# EAGLE board PS-001 (EAGLE 9.5.2)
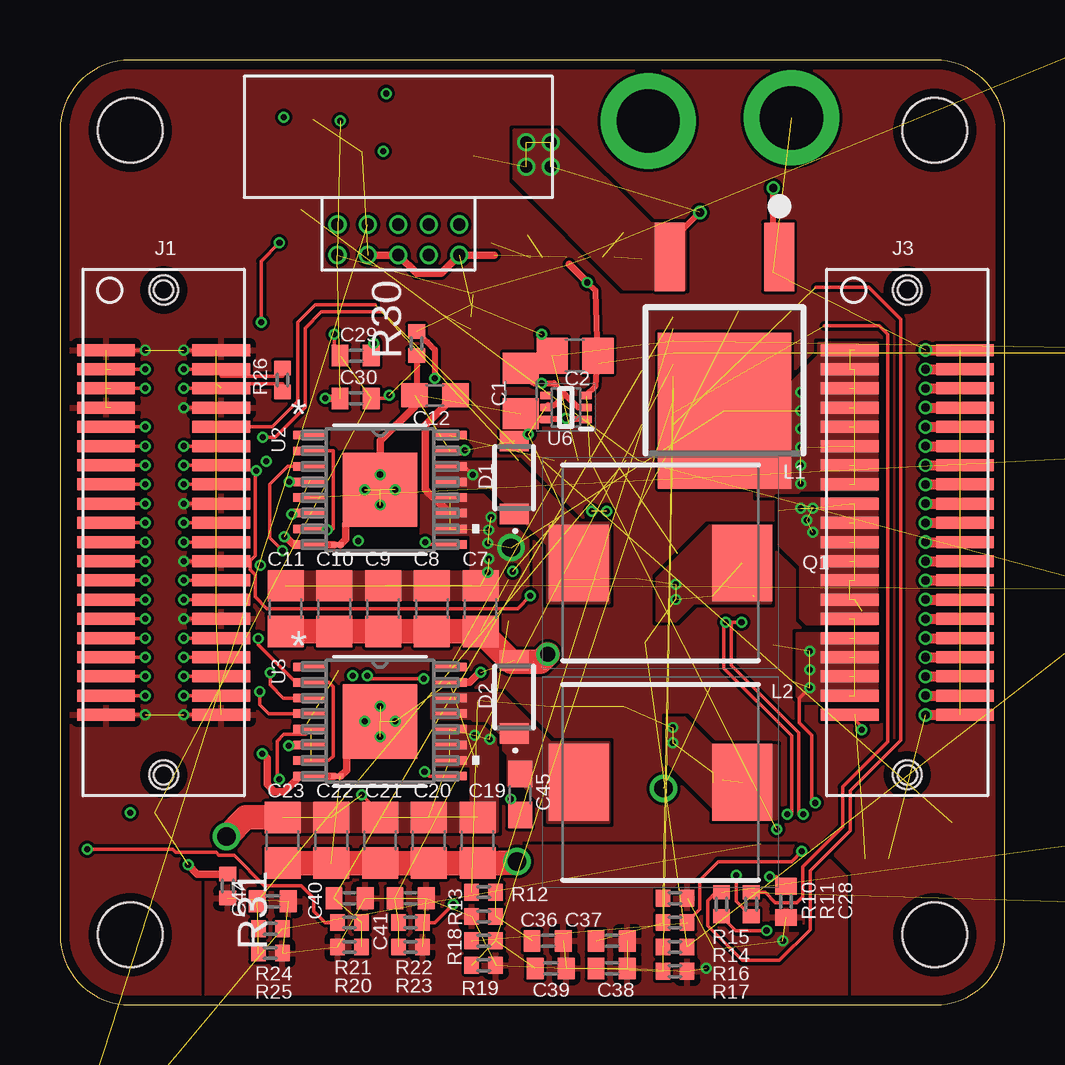
[diagram p0: board, top side]
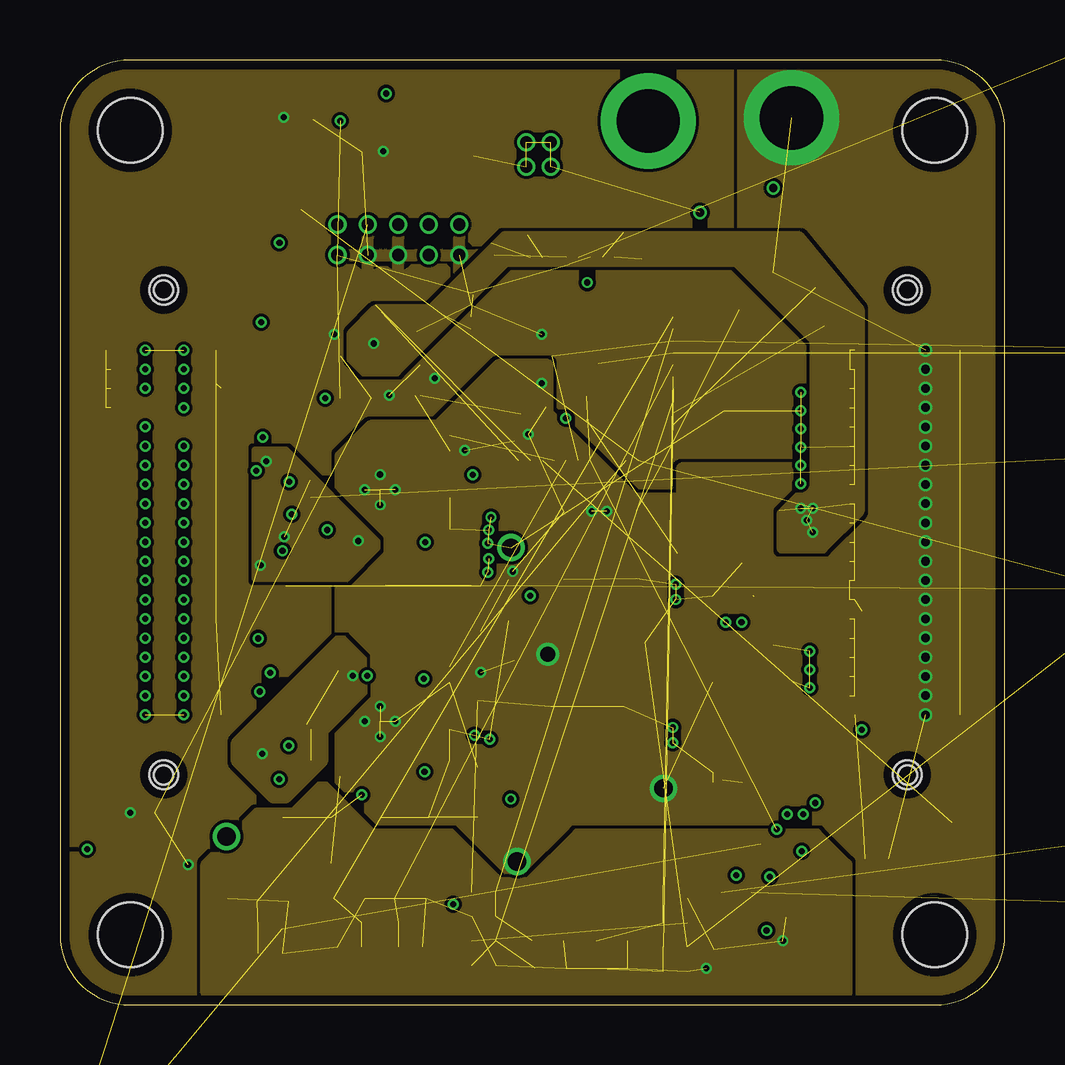
[diagram p1: board, inner layer Route2]
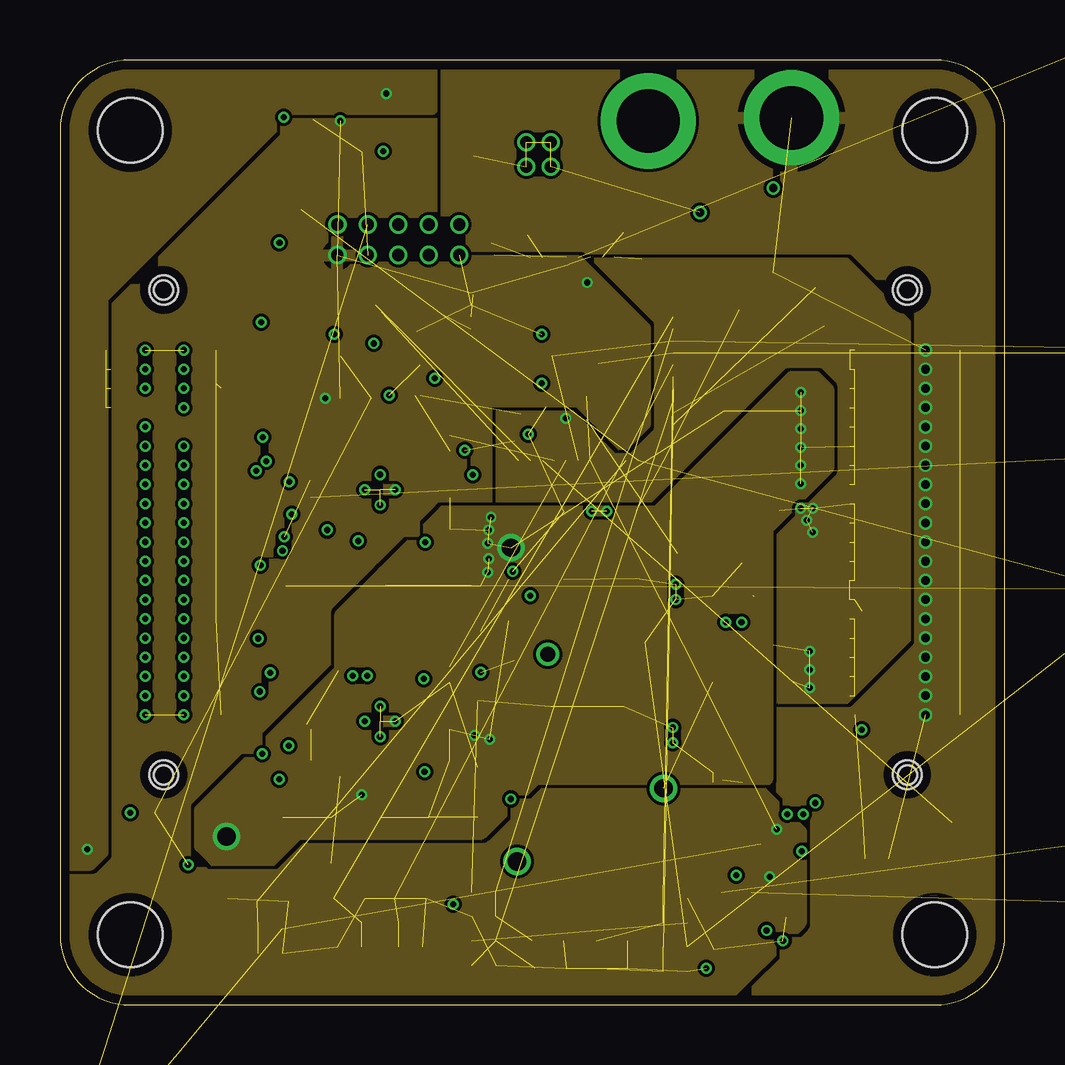
[diagram p2: board, inner layer Route15]
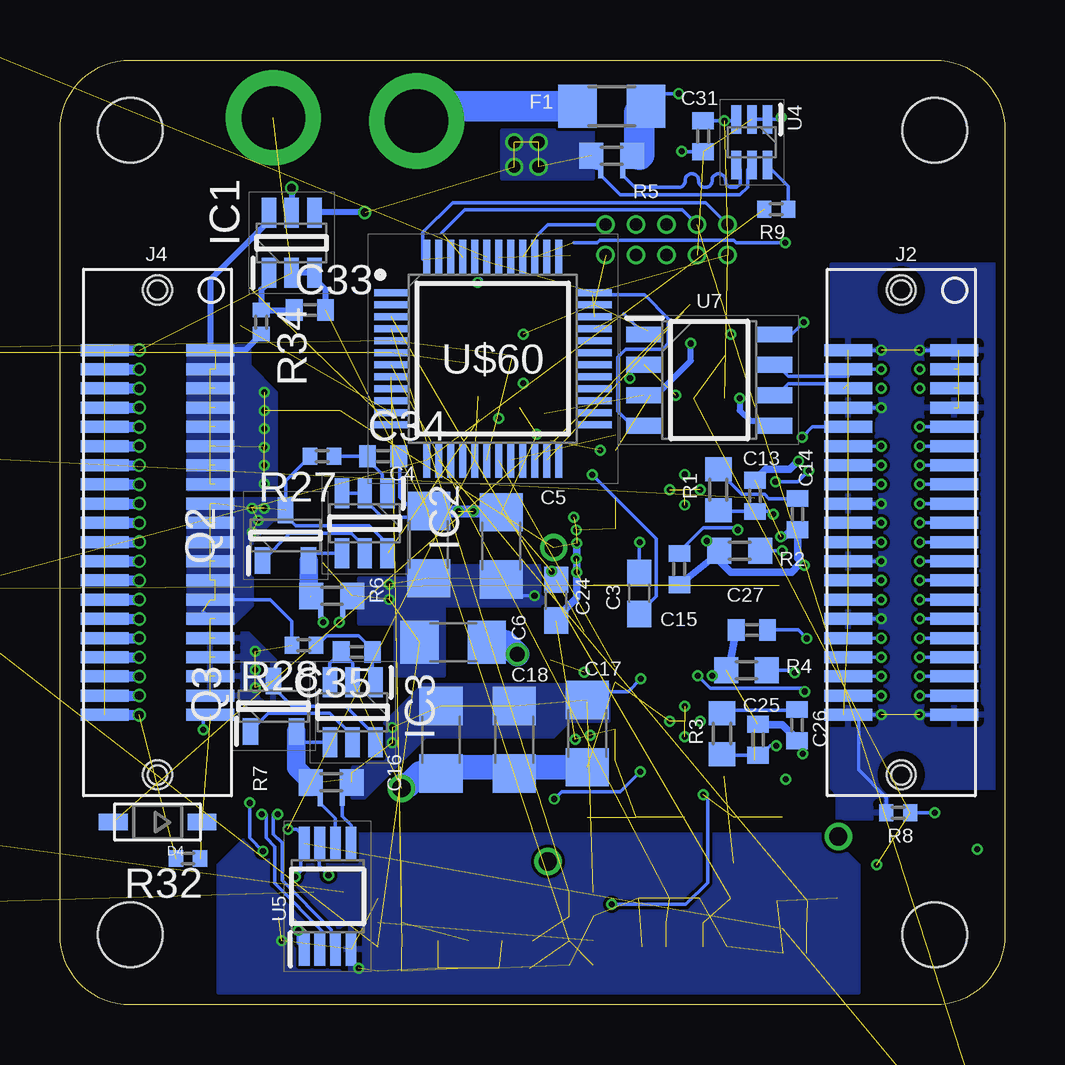
[diagram p3: board, bottom side, seen from below]

Size 39.37 x 39.37 mm. Coordinates in mm from the lower left corner, seen from the top.
Outline: 0,36.45 0,2.92 arc90 2.92,0 36.45,0 arc90 39.37,2.92 39.37,36.45 arc90 36.45,39.37 2.92,39.37 arc90 0,36.45
Copper layers (1*2*15*16): Top 0.035559375mm / dielectric 0.17018125mm / Route2 0.01778125mm / dielectric 47mil / Route15 0.01778125mm / dielectric 0.17018125mm / Bottom 0.035559375mm
Design rules "OSHPark-4layer *": minimum track width 6mil, minimum drill 10mil, track to track 5mil, track to pad 5mil, pad to pad 5mil, via to via 5mil, smd to smd 5mil, copper to edge 15mil, drill to drill 6mil, minimum pad ring 4mil, minimum via ring 4mil, stop-mask expansion 2.5mil, vias tented up to drill 14mil, thermal gap 10mil
Holes 2.69 mm at 2.92,36.45 36.45,36.45 36.45,2.92 2.92,2.92
vRestrict: area 0,0 to 5.8,5.8; area 33.5,0 to 39.4,5.8; area 33.5,33.5 to 39.4,39.4; area 0,33.5 to 5.8,39.4

## Footprints (pad centres in the part's own frame; a part is rotated, then mirrored left to right if it is on the bottom)
C0805 = smd 1.3 x 1.5: 1 -0.95,0; 2 0.95,0
C0603 = smd 1.1 x 1: 1 -0.85,0; 2 0.85,0
C1206 = smd 1.6 x 1.8: 1 -1.4,0; 2 1.4,0
C0402 = smd 0.7 x 0.9: 1 -0.65,0; 2 0.65,0
PMDU = smd 1.2 x 0.85: 1 0,1.525; 2 0,-1.525
SOD-123 = smd 1.2 x 0.7: A 1.85,0; C -1.85,0
R1206 = smd 1.6 x 1.803: 1 -1.422,0; 2 1.422,0
SOT95P280X110-6N = smd 1.25 x 0.6: 1 -1.25,0.95; 2 -1.25,0; 3 -1.25,-0.95; 4 1.25,-0.95; 5 1.25,0; 6 1.25,0.95
10144517-042802LF = smd 0.5 x 2.4: 1 7.6,2.4; 2 7.6,-2.4; 3 6.8,2.4; 4 6.8,-2.4; 5 6,2.4; 6 6,-2.4; 7 5.2,2.4; 8 5.2,-2.4; 9 4.4,2.4; 10 4.4,-2.4; 11 3.6,2.4; 12 3.6,-2.4; 13 2.8,2.4; 14 2.8,-2.4; 15 2,2.4; 16 2,-2.4; 17 1.2,2.4; 18 1.2,-2.4; 19 0.4,2.4; 20 0.4,-2.4; 21 -0.4,2.4; 22 -0.4,-2.4; 23 -1.2,2.4; 24 -1.2,-2.4; 25 -2,2.4; 26 -2,-2.4; 27 -2.8,2.4; 28 -2.8,-2.4; 29 -3.6,2.4; 30 -3.6,-2.4; 31 -4.4,2.4; 32 -4.4,-2.4; 33 -5.2,2.4; 34 -5.2,-2.4; 35 -6,2.4; 36 -6,-2.4; 37 -6.8,2.4; 38 -6.8,-2.4; 39 -7.6,2.4; 40 -7.6,-2.4 | hole 1.2: 10.1,0 | hole 0.8: -10.1,0
10144518-041802LF = smd 0.5 x 2: 1 -7.6,2.2; 2 -7.6,-2.2; 3 -6.8,2.2; 4 -6.8,-2.2; 5 -6,2.2; 6 -6,-2.2; 7 -5.2,2.2; 8 -5.2,-2.2; 9 -4.4,2.2; 10 -4.4,-2.2; 11 -3.6,2.2; 12 -3.6,-2.2; 13 -2.8,2.2; 14 -2.8,-2.2; 15 -2,2.2; 16 -2,-2.2; 17 -1.2,2.2; 18 -1.2,-2.2; 19 -0.4,2.2; 20 -0.4,-2.2; 21 0.4,2.2; 22 0.4,-2.2; 23 1.2,2.2; 24 1.2,-2.2; 25 2,2.2; 26 2,-2.2; 27 2.8,2.2; 28 2.8,-2.2; 29 3.6,2.2; 30 3.6,-2.2; 31 4.4,2.2; 32 4.4,-2.2; 33 5.2,2.2; 34 5.2,-2.2; 35 6,2.2; 36 6,-2.2; 37 6.8,2.2; 38 6.8,-2.2; 39 7.6,2.2; 40 7.6,-2.2 | hole 1.2: 10.1,0 | hole 0.8: -10.1,0
2X5_RIGHT = drill 0.508: 1 2.54,0; 2 2.54,-1.27; 3 1.27,0; 4 1.27,-1.27; 5 0,0; 6 0,-1.27; 7 -1.27,0; 8 -1.27,-1.27; 9 -2.54,0; 10 -2.54,-1.27
INDPM8282X450N = smd 2.5 x 3.2: 1 -3.4,0; 2 3.4,0
DPAK3-CASE-369AS = smd 1.25 x 2.85: 1 -2.28,-6.4; 2 2.28,-6.4 | smd 5.55 x 6.5: 3 0,0
SOT96P240X100-3N = smd 1.1 x 0.65: 1 -1.05,0.96; 2 -1.05,-0.96; 3 1.05,0
R0603 = smd 1 x 1.1: 1 -0.85,0; 2 0.85,0
R0402 = smd 0.6 x 0.7: 1 -0.5,0; 2 0.5,0
SHORT_TOP-8 = smd 0.254 x 0.203: 1 0.127,0; 2 -0.127,0
21-0108G_U16E-3 = smd 1.422 x 0.356: 1 -2.896,2.275; 2 -2.896,1.625; 3 -2.896,0.975; 4 -2.896,0.325; 5 -2.896,-0.325; 6 -2.896,-0.975; 7 -2.896,-1.625; 8 -2.896,-2.275; 9 2.896,-2.275; 10 2.896,-1.625; 11 2.896,-0.975; 12 2.896,-0.325; 13 2.896,0.325; 14 2.896,0.975; 15 2.896,1.625; 16 2.896,2.275 | smd 3.099 x 3.099: 17 0,0
SOT65P210X110-6N = smd 1.2 x 0.4: 1 -0.95,0.65; 2 -0.95,0; 3 -0.95,-0.65; 4 0.95,-0.65; 5 0.95,0; 6 0.95,0.65
SOP65P490X110-8N = smd 1.4 x 0.45: 1 -2.2,0.975; 2 -2.2,0.325; 3 -2.2,-0.325; 4 -2.2,-0.975; 5 2.2,-0.975; 6 2.2,-0.325; 7 2.2,0.325; 8 2.2,0.975
SOTFL50P160X60-6N = smd 0.475 x 0.3: 1 -0.838,0.5; 2 -0.838,0; 3 -0.838,-0.5; 4 0.838,-0.5; 5 0.838,0; 6 0.838,0.5
SOIC127P600X175-8N = smd 1.5 x 0.65: 1 -2.7,1.905; 2 -2.7,0.635; 3 -2.7,-0.635; 4 -2.7,-1.905; 5 2.7,-1.905; 6 2.7,-0.635; 7 2.7,0.635; 8 2.7,1.905
12AWG-STRANDED = drill 2.642 pad 3.962: P$1 0,0
QFP50P900X900X120-48N = smd 1.45 x 0.3: 1 -4.225,2.75; 2 -4.225,2.25; 3 -4.225,1.75; 4 -4.225,1.25; 5 -4.225,0.75; 6 -4.225,0.25; 7 -4.225,-0.25; 8 -4.225,-0.75; 9 -4.225,-1.25; 10 -4.225,-1.75; 11 -4.225,-2.25; 12 -4.225,-2.75; 25 4.225,-2.75; 26 4.225,-2.25; 27 4.225,-1.75; 28 4.225,-1.25; 29 4.225,-0.75; 30 4.225,-0.25; 31 4.225,0.25; 32 4.225,0.75; 33 4.225,1.25; 34 4.225,1.75; 35 4.225,2.25; 36 4.225,2.75 | smd 0.3 x 1.45: 13 -2.75,-4.225; 14 -2.25,-4.225; 15 -1.75,-4.225; 16 -1.25,-4.225; 17 -0.75,-4.225; 18 -0.25,-4.225; 19 0.25,-4.225; 20 0.75,-4.225; 21 1.25,-4.225; 22 1.75,-4.225; 23 2.25,-4.225; 24 2.75,-4.225; 37 2.75,4.225; 38 2.25,4.225; 39 1.75,4.225; 40 1.25,4.225; 41 0.75,4.225; 42 0.25,4.225; 43 -0.25,4.225; 44 -0.75,4.225; 45 -1.25,4.225; 46 -1.75,4.225; 47 -2.25,4.225; 48 -2.75,4.225

## Placement (x,y rotation side)
C1  10uF  [C0805]  19.2,25.58 90 top
C2  10uF  [C0805]  21.46,27.05 180 top
C3  100nF  [C0603]  15.24,17.14 270 bottom
C4  22uF  [C1206]  24,19.18 90 bottom
C5  22uF  [C1206]  20.98,19.13 90 bottom
C6  22uF  [C1206]  22.99,15.11 0 bottom
C7  4.7uF  [C0805]  17.53,16.51 270 top
C8  4.7uF  [C0805]  15.49,16.51 270 top
C9  4.7uF  [C0805]  13.46,16.51 270 top
C10  4.7uF  [C0805]  11.43,16.51 270 top
C11  4.7uF  [C0805]  9.4,16.51 270 top
C12  100nF  [C0603]  15.62,25.4 180 top
C13  1pF  [C0402]  10.41,21.21 90 bottom
C14  1pF  [C0402]  8.64,20.45 270 bottom
C15  1uF  [C0402]  13.56,18.16 270 bottom
C16  22uF  [C1206]  23.5,11.05 270 bottom
C17  22uF  [C1206]  17.4,11.3 270 bottom
C18  22uF  [C1206]  20.45,11.05 270 bottom
C19  4.7uF  [C0805]  17.4,6.86 270 top
C20  4.7uF  [C0805]  15.37,6.86 270 top
C21  4.7uF  [C0805]  13.34,6.86 270 top
C22  4.7uF  [C0805]  11.3,6.86 270 top
C23  4.7uF  [C0805]  9.27,6.86 270 top
C24  100nF  [C0603]  18.69,16.87 90 bottom
C25  1pF  [C0402]  10.29,11.05 90 bottom
C26  1pF  [C0402]  8.66,11.66 270 bottom
C27  1uF  [C0402]  10.54,15.62 180 bottom
C28  100nF  [C0402]  30.25,4.29 270 top
C29  100nF  [C0402]  12.32,27.05 180 top
C30  100nF  [C0402]  12.32,25.27 0 top
C31  100nF  [C0402]  12.57,36.2 270 bottom
C32  100nF  [C0805]  57.4,27.18 0 bottom  (outside the outline)
C33  100nF  [C0402]  28.96,28.96 0 bottom
C34  100nF  [C0402]  25.91,22.86 0 bottom
C35  100nF  [C0402]  27,14.71 180 bottom
C36  1u  [C0402]  20.32,2.67 0 top
C37  1u  [C0402]  22.99,2.67 0 top
C38  100n  [C0402]  22.99,1.52 0 top
C39  100n  [C0402]  20.45,1.52 0 top
C40  100nF  [C0402]  12.06,4.45 0 top
C41  100nF  [C0402]  14.61,4.45 0 top
C44  1u  [C0402]  8.86,4.32 0 top
C45  100nF  [C0603]  19.18,8.76 90 top
C46  1uF  [C0805]  57.4,52.58 0 bottom  (outside the outline)
C47  100nF  [C0805]  57.4,46.23 0 bottom  (outside the outline)
C48  100nF  [C0805]  57.4,39.88 0 bottom  (outside the outline)
C49  100nF  [C0805]  57.4,33.53 0 bottom  (outside the outline)
C50  100nF  [C0402]  56.64,13.72 0 bottom  (outside the outline)
C51  100nF  [C0402]  57.91,8.89 0 bottom  (outside the outline)
C52  100nF  [C0402]  57.91,3.81 0 bottom  (outside the outline)
D1  RBR3MM60ATFTR  [PMDU]  18.92,21.97 180 top
D2  RBR3MM60ATFTR  [PMDU]  18.92,12.83 180 top
D4  [SOD-123]  35.31,7.62 180 bottom
F1  [R1206]  16.38,37.44 0 bottom
IC1  LM5050Q1MKX-1_NOPB  [SOT95P280X110-6N]  29.72,31.75 90 bottom
IC2  LM5050Q1MKX-1_NOPB  [SOT95P280X110-6N]  26.67,20.07 270 bottom
IC3  LM5050Q1MKX-1_NOPB  [SOT95P280X110-6N]  27.18,12.19 270 bottom
J1  10144517-042802LF  [10144517-042802LF]  4.32,19.68 90 top
J2  10144518-041802LF  [10144518-041802LF]  4.32,19.68 270 bottom
J3  10144517-042802LF  [10144517-042802LF]  35.31,19.68 90 top
J4  10144518-041802LF  [10144518-041802LF]  35.31,19.68 270 bottom
J6  2X5_0.05_SWD  [2X5_RIGHT]  14.1,31.24 180 top
L1  DD1217AS-H-4R7N=P3  [INDPM8282X450N]  25.02,18.41 0 top
L2  DD1217AS-H-4R7N=P3  [INDPM8282X450N]  25.02,9.27 0 top
Q1  FDD86369-F085  [DPAK3-CASE-369AS]  27.69,24.77 180 top
Q2  DMG6968UQ-7  [SOT96P240X100-3N]  29.97,19.56 90 bottom
Q3  DMG6968UQ-7  [SOT96P240X100-3N]  30.48,12.45 90 bottom
R1  63.4k  [R0603]  11.94,21.46 270 bottom
R2  40.2k  [R0603]  11.05,18.92 0 bottom
R3  63.4k  [R0603]  11.79,11.3 270 bottom
R4  40.2k  [R0603]  10.77,13.94 0 bottom
R5  10m  [R0603]  16.38,35.38 180 bottom
R6  10m  [R0603]  28.04,17.04 180 bottom
R7  10m  [R0603]  28.07,9.27 180 bottom
R8  [R0402]  4.45,8 0 bottom
R9  2.2k  [R0402]  9.53,33.15 180 bottom
R10  2.2k  [R0402]  27.56,4.19 90 top
R11  2.2k  [R0402]  28.8,4.19 90 top
R12  2.2k  [R0402]  17.65,4.7 180 top
R13  2.2k  [R0402]  17.65,3.68 0 top
R14  2.2k  [R0402]  25.63,3.43 0 top
R15  2.2k  [R0402]  25.63,4.45 180 top
R16  20k  [R0402]  25.63,2.41 0 top
R17  10k  [R0402]  25.63,1.4 180 top
R18  20k  [R0402]  17.65,2.67 180 top
R19  10k  [R0402]  17.65,1.65 180 top
R20  150k  [R0402]  12.06,3.43 180 top
R21  10k  [R0402]  12.06,2.41 0 top
R22  150k  [R0402]  14.61,3.43 0 top
R23  10k  [R0402]  14.61,2.41 180 top
R24  2.2k  [R0402]  8.76,3.17 0 top
R25  2.2k  [R0402]  8.76,2.16 180 top
R26  120 DNP  [R0402]  9.27,26.04 90 top
R27  100  [R0402]  28.45,22.86 180 bottom
R28  100  [R0402]  29.21,14.99 180 bottom
R29  5.6k  [R0402]  53.59,23.37 0 bottom  (outside the outline)
R30  [R0402]  14.86,27.56 90 top
R31  [R0402]  6.99,4.95 270 top
R32  10k  [R0402]  34.04,6.1 0 bottom
R33  2.2k  [R0402]  52.32,17.27 0 bottom  (outside the outline)
R34  100  [R0402]  30.99,28.45 270 bottom
R35  1k  [R0402]  1.02,-6.1 0 top  (outside the outline)
SH1  SHORTT8  [SHORT_TOP-8]  27.61,8.56 270 bottom
SH2  SHORTT8  [SHORT_TOP-8]  28.52,8.53 270 bottom
SH3  SHORTT8  [SHORT_TOP-8]  27.58,16.36 270 bottom
SH4  SHORTT8  [SHORT_TOP-8]  28.5,16.36 270 bottom
SH5  SHORTT8  [SHORT_TOP-8]  15.93,34.7 270 bottom
SH6  SHORTT8  [SHORT_TOP-8]  16.84,34.7 270 bottom
SH7  SHORTT8  [SHORT_TOP-8]  11.56,19.18 180 top
SH8  SHORTT8  [SHORT_TOP-8]  11.56,9.53 180 top
U2  MAX16935CAUES/V+  [21-0108G_U16E-3]  13.34,21.46 0 top
U3  MAX16935CAUES/V+  [21-0108G_U16E-3]  13.34,11.81 0 top
U4  INA186A2IDCKT  [SOT65P210X110-6N]  10.54,35.94 270 bottom
U5  INA2180A4IDGKR  [SOP65P490X110-8N]  28.22,4.52 90 bottom
U6  NCV8170AXV330T2G  [SOTFL50P160X60-6N]  21.08,24.89 180 top
U7  ATA6561-GAQW-N  [SOIC127P600X175-8N]  12.32,26.04 0 bottom
U$9  WIRE-PAD  [12AWG-STRANDED]  30.48,36.96 90 top
U$13  WIRE-PAD  [12AWG-STRANDED]  24.51,36.83 90 top
U$60  ATSAMC21G17A-AUT  [QFP50P900X900X120-48N]  21.34,26.92 0 bottom

## Library data of the parts
C1-C41 C44-C52 = rcl; SPICEPREFIX: C
D1 D2 = SamacSys_Parts; DESCRIPTION: ROHM - RBR3MM60ATFTR - SCHOTTKY RECTIFIER, AEC-Q101, 3A, 60V; HEIGHT: mm; MANUFACTURER_NAME: ROHM Semiconductor; MANUFACTURER_PART_NUMBER: RBR3MM60ATFTR; MOUSER_PART_NUMBER: 755-RBR3MM60ATFTR; MOUSER_PRICE-STOCK: https://www.mouser.com/Search/Refine.aspx?Keyword=755-RBR3MM60ATFTR
D4 F1 = adafruit
IC1-IC3 = SamacSys_Parts; DESCRIPTION: OR Controller N-Channel Single-OUT Automotive 6-Pin TSOT-23 T/R; HEIGHT: 1.1mm; MANUFACTURER_NAME: Texas Instruments; MANUFACTURER_PART_NUMBER: LM5050Q1MKX-1/NOPB; MOUSER_PART_NUMBER: 595-LM5050Q1MKX1NOPB; MOUSER_PRICE-STOCK: https://www.mouser.com/Search/Refine.aspx?Keyword=595-LM5050Q1MKX1NOPB
J1-J4 = BergStak
J6 = Headers
L1 L2 = SamacSys Managed; DESCRIPTION: MURATA - DD1217AS-H-4R7N=P3 - Power Inductor (SMD), 4.7 ?H, 6.3 A, Wirewound, 6.7 A, DEM8045C_DD Series, 8mm x 8mm x 4.5mm; HEIGHT: 4.5mm; MANUFACTURER_NAME: Murata Electronics; MANUFACTURER_PART_NUMBER: DD1217AS-H-4R7N=P3
Q1 = SamacSys_Parts; DESCRIPTION: MOSFET 80V 90A Dual DPAK N-Chnl PowerTrench; HEIGHT: mm; MANUFACTURER_NAME: ON Semiconductor; MANUFACTURER_PART_NUMBER: FDD86369-F085; MOUSER_PART_NUMBER: 512-FDD86369_F085; MOUSER_PRICE-STOCK: https://www.mouser.com/Search/Refine.aspx?Keyword=512-FDD86369_F085
Q2 Q3 = SamacSys_Parts; DESCRIPTION: Trans MOSFET N-CH 20V 6.5A Automotive 3-Pin SOT-23 T/R; HEIGHT: 1mm; MANUFACTURER_NAME: Diodes Inc.; MANUFACTURER_PART_NUMBER: DMG6968UQ-7; MOUSER_PART_NUMBER: 621-DMG6968UQ-7; MOUSER_PRICE-STOCK: https://www.mouser.com/Search/Refine.aspx?Keyword=621-DMG6968UQ-7
R1-R35 = rcl; SPICEPREFIX: R
SH1-SH8 = shorts
U2 U3 = MAX16935; MANUFACTURER_PART_NUMBER: MAX16935CAUESV+; VENDOR: Maxim Integrated Products
U4 = SamacSys_Parts; DESCRIPTION: Current Sense Amplifiers Voltage output high-side measurement current shunt monitor 6-SC70 -40 to 125; HEIGHT: 1.1mm; MANUFACTURER_NAME: Texas Instruments; MANUFACTURER_PART_NUMBER: INA186A2IDCKT; MOUSER_PART_NUMBER: 595-INA186A2IDCKT; MOUSER_PRICE-STOCK: https://www.mouser.com/Search/Refine.aspx?Keyword=595-INA186A2IDCKT
U5 = SamacSys_Parts; DESCRIPTION: Current Sense Amplifiers Dual 26V, Low- or High-Side Voltage Output Current Sense Amplifier 8-VSSOP -40 to 125; HEIGHT: 1.1mm; MANUFACTURER_NAME: Texas Instruments; MANUFACTURER_PART_NUMBER: INA2180A2IDGKR; MOUSER_PART_NUMBER: 595-INA2180A2IDGKR; MOUSER_PRICE-STOCK: https://www.mouser.com/Search/Refine.aspx?Keyword=595-INA2180A2IDGKR
U6 = SamacSys_Parts; DESCRIPTION: ON Semiconductor NCV8170AXV330T2G, LDO Voltage Regulator, 3.3 V +/-1%, 2.2 5.5 Vin, 6-Pin SOT-563; HEIGHT: 0.6mm; MANUFACTURER_NAME: ON Semiconductor; MANUFACTURER_PART_NUMBER: NCV8170AXV330T2G; MOUSER_PART_NUMBER: 863-NCV8170AXV330T2G; MOUSER_PRICE-STOCK: https://www.mouser.com/Search/Refine.aspx?Keyword=863-NCV8170AXV330T2G
U7 = SamacSys Managed; DESCRIPTION: MICROCHIP - ATA6561-GAQW-N - CAN TRANSCEIVER, 5MBPS, -40 TO 150DEG C; HEIGHT: 1.75mm; MANUFACTURER_NAME: Microchip; MANUFACTURER_PART_NUMBER: ATA6561-GAQW-N; MOUSER_PART_NUMBER: 579-ATA6561-GAQW-N; MOUSER_PRICE-STOCK: https://www.mouser.com/Search/Refine.aspx?Keyword=579-ATA6561-GAQW-N
U$9 U$13 = Wire Pads
U$60 = ATSAM

## Nets
+3.3V_INT_VMON: C44.1 R24.1 R25.2 U$60.14
+3.5V_IMON_SENSE_N: SH2.1 U5.6
+3.5V_IMON_SENSE_P: SH1.1 U5.5
+3V3: C2.1 C28.1 C30.1 C31.1 C32.1 C48.1 C49.1 J6.1 R24.2 R35.2 U4.3 U5.8 U6.3 U7.5 U$60.6 U$60.17 U$60.36 U$60.44
+5V: C1.1 C29.1 IC2.6 IC3.6 J3.17 J3.19 J3.21 J3.23 J3.25 J3.27 J3.29 J3.31 J3.33 J3.35 J3.37 J4.17 J4.19 J4.21 J4.23 J4.25 J4.27 J4.29 J4.31 J4.33 J4.35 J4.37 Q2.3 Q3.3 R14.2 R18.2 R27.2 R28.2 U6.1 U6.6 U7.3
+5V_IMON: C52.1 R11.2 U$60.11
+5V_IMON_SENSE_N: SH4.1 U5.2
+5V_IMON_SENSE_P: SH3.1 U5.3
+5V_INT_VMON: C36.1 R12.1 R13.2 U$60.4
+5V_REG: C16.1 C17.1 C18.1 L2.2 R7.1 R12.2 SH1.2 U3.4
+5V_VMON: C37.1 R14.1 R15.2 U$60.8
+12V_FB: R29.1 R33.2 U2.5
+12V_IMON: C51.1 R10.2 U$60.12
+12V_INT_VMON: C38.1 R16.1 R17.2 U$60.9
+12V_REG: C4.1 C5.1 C6.1 L1.2 R6.1 R16.2 R29.2 SH3.2 U2.4
+12V_VMON: C39.1 R18.1 R19.2 U$60.10
+V_BAT: C7.1 C8.1 C9.1 C10.1 C11.1 C12.1 C19.1 C20.1 C21.1 C22.1 C23.1 C24.1 IC1.6 J3.1 J3.3 J3.5 J3.7 J3.9 J3.11 J3.13 J3.15 J4.1 J4.3 J4.5 J4.7 J4.9 J4.11 J4.13 J4.15 Q1.3 R22.2 R34.2 U2.10 U2.11 U2.12 U3.10 U3.11 U3.12
+V_BAT_IMON: C50.1 R9.2 U$60.13
+V_BAT_IMON_SENSE_N: SH6.1 U4.5
+V_BAT_IMON_SENSE_P1: SH5.1 U4.4
+V_BAT_INT: F1.2 R5.1 R20.2 SH5.2
+V_BAT_INT_VMON: C40.1 R20.1 R21.2 U$60.3
+V_BAT_VMON: C41.1 R22.1 R23.2 U$60.7
AGND: C28.2 C36.2 C37.2 C38.2 C39.2 C40.2 C41.2 C44.2 R13.1 R15.1 R17.1 R19.1 R21.1 R23.1 R25.1 R31.2 U5.4
CAN0_N: J2.6
CAN0_P: J1.4 J2.4 R26.2 U7.7
CAN1_N: J1.5 J2.5
CAN1_P: J1.3 J2.3
CAN_N: J1.6 R26.1 U7.6
CAN_STBY: U7.8 U$60.39
CANRX: U7.4 U$60.34
CANTX: U7.1 U$60.33
DETECT_A: J1.10 U$60.22
DETECT_B: J2.10 U$60.23
DGND: C2.2 C29.2 C30.2 C31.2 C32.2 C46.2 C47.2 C48.2 C49.2 C50.2 C51.2 C52.2 J6.3 J6.5 J6.9 R8.2 R30.2 R31.1 U4.1 U4.2 U7.2 U$60.5 U$60.18 U$60.35 U$60.42
ETH_RX+: J1.36 J2.36
ETH_RX-: J1.38 J2.38
ETH_TX+: J1.32 J2.32
ETH_TX-: J1.34 J2.34
GND1: C13.2 C14.2 C15.2 R2.1 R33.1 SH7.1 U2.8
GND2: C25.2 C26.2 C27.2 R4.1 SH8.1 U3.8
I2C_SCL: J1.22 J2.22
I2C_SDA: J1.20 J2.20
N$1: R2.2 U2.3
N$2: C13.1 R1.2 U2.6
N$3: C3.1 U2.9
N$4: C3.2 D1.1 L1.1 U2.13 U2.14
N$5: C45.2 D2.1 L2.1 U3.13 U3.14
N$6: C45.1 U3.9
N$7: C25.1 R3.2 U3.6
N$8: C14.1 R1.1
N$9: C26.1 R3.1
N$10: R4.2 U3.3
N$11: IC2.4 Q2.2 R6.2 SH4.2
N$12: IC3.4 Q3.2 R7.2 SH2.2
N$13: IC1.5 Q1.1
N$14: C33.1 IC1.1 R34.1
N$16: F1.1 U$13.P$1
N$17: R9.1 U4.6
N$18: R10.1 U5.1
N$19: IC1.4 Q1.2 R5.2 SH6.2
N$20: IC2.5 Q2.1
N$21: R11.1 U5.7
N$22: C34.1 IC2.1 R27.1
N$25: IC3.5 Q3.1
N$26: C35.1 IC3.1 R28.1
N$29: C46.1 C47.1 U$60.43
N$30: D4.A U$60.21
P_GOOD: D4.C J3.39 J4.39 R32.2
PGND: C1.2 C4.2 C5.2 C6.2 C7.2 C8.2 C9.2 C10.2 C11.2 C12.2 C16.2 C17.2 C18.2 C19.2 C20.2 C21.2 C22.2 C23.2 C24.2 C33.2 C34.2 C35.2 D1.2 D2.2 IC1.2 IC1.3 IC2.2 IC2.3 IC3.2 IC3.3 J3.2 J3.4 J3.6 J3.8 J3.10 J3.12 J3.14 J3.16 J3.18 J3.20 J3.22 J3.24 J3.26 J3.28 J3.30 J3.32 J3.34 J3.36 J3.38 J3.40 J4.2 J4.4 J4.6 J4.8 J4.10 J4.12 J4.14 J4.16 J4.18 J4.20 J4.22 J4.24 J4.26 J4.28 J4.30 J4.32 J4.34 J4.36 J4.38 J4.40 R30.1 R32.1 SH7.2 SH8.2 U2.15 U2.17 U3.15 U3.17 U6.2 U6.5 U$9.P$1
PGOOD_+3.5V: U3.16 U$60.19
PGOOD_+5V: U2.16 U$60.20
RESET: J6.10 U$60.40
RFU_9: J1.9 J2.9
RFU_11: J1.11 J2.11
RFU_13: J1.13 J2.13
RFU_15: J1.15 J2.15
RFU_17: J1.17 J2.17
RFU_19: J1.19 J2.19
RFU_21: J1.21 J2.21
RFU_23: J1.23 J2.23
RFU_25: J1.25 J2.25
RFU_27: J1.27 J2.27
RFU_29: J1.29 J2.29
RFU_31: J1.31 J2.31
RFU_33: J1.33 J2.33
RFU_35: J1.35 J2.35
RFU_37: J1.37 J2.37
RS485_D+: J1.26 J2.26
RS485_D-: J1.28 J2.28
SHIELD: J1.1 J1.2 J1.7 J1.8 J1.18 J1.24 J1.30 J1.39 J1.40 J2.1 J2.2 J2.7 J2.8 J2.18 J2.24 J2.30 J2.39 J2.40 R8.1
SPI_MISO: J1.12 J2.12
SPI_MOSI: J1.14 J2.14
SPI_SCK: J1.16 J2.16
SWCLK: J6.4 R35.1 U$60.45
SWDIO: J6.2 U$60.46
VBIAS_U2: C15.1 U2.2 U2.7
VBIAS_U3: C27.1 U3.2 U3.5 U3.7

## Tracks (layer width: path | path; a pad name or v marks a point on that pad's centre or on a via)
+3.3V_INT_VMON  (3 unrouted)
+3.5V_IMON_SENSE_N
  Bottom 0.152: SH2.1 27.89,7.78 U5.6
+3.5V_IMON_SENSE_P
  Bottom 0.152: U5.5 27.24,7.48 27.61,7.85 27.61,8.36 SH1.1
+3V3  (via drill 0.25)  (13 unrouted)
  Top 0.152: C28.1 29.86,5.33 v29.57,5.33
  Top 0.254: 21.84,30.23 v21.97,30.1 22.31,29.76 C2.1 | 22.43,26.73 22.31,26.85 C2.1 | 21.95,25.37 U6.3 22.31,25.79 C2.1
  Top 0.305: C30.1 v11.05,25.27 | 21.21,30.86 21.84,30.23
  Bottom 0.152: v29.87,7.32 29.52,7.32 29.19,7 U5.8 29.34,6.58 29.34,5.56 v29.57,5.33 | U4.3 11.25,36.83 v11.68,36.83 11.7,36.84 C31.1
  Bottom 0.254: v21.97,30.1 21.86,30.21 | v11.05,25.27 11.05,24.77 10.62,24.33 9.82,24.33 U7.5
  pour Route15 (rank 3): 24.38,24.21 24.38,28.19 21.59,30.99 16,30.99 15.49,31.5 15.49,37.34 5.08,37.34 0,32.26 0,0 27.43,0 30.88,3.45 30.88,7.22 26.42,11.68 17.78,11.68 17.78,25.15 21.59,25.15 23.46,23.28
+5V  (via drill 0.25)  (33 unrouted)
  Top 0.152: v31.47,8.41 31.32,8.41 31.32,11.24 30.81,11.75 30.81,12.78 v31.24,13.21 | v30.91,6.4 30.48,5.97 27.42,5.97 26.66,5.2 26.66,3.98 26.13,3.45 R14.2
  Top 0.254: U6.1 21.08,24.39 | 21.08,24.39 U6.6 | 21.08,24.39 v21.08,24.44
  Top 0.305: v13.08,27.56 13.08,27.16 C29.1 | U6.6 19.54,24.39 C1.1
  Bottom 0.152: v30.91,6.4 31.47,6.96 v31.47,8.41 | Q3.3 30.48,13.24 29.68,12.45 27.47,12.45 26.23,11.2 IC3.6 | J4.29 33.43,16.41 | IC2.6 25.72,19.19 26.49,19.96 29.56,19.96 29.97,20.38 Q2.3 29.97,21.84 R27.2 | R28.2 29.71,15.99 30.6,16.89 J4.27
  Bottom 0.254: U7.3 14.53,25.4 13.08,26.84 v13.08,27.56
  other vias: 31.24,14.73 31.24,13.97 30.86,20.7 31.37,20.7 31.11,20.19 31.37,19.68
  pour Top (no thermals): 34.04,15.47 30.71,15.47 30.71,12.85 30.86,12.7 34.04,12.7
  pour Route15 (rank 4): 15.49,21.08 29.97,21.08 29.97,12.7 32.77,12.7 35.31,15.24 35.31,28.45 32.77,30.99 15.49,30.99
  pour Bottom: 34.04,12.7 34.04,15.49 31.5,15.49 30.23,14.22 30.23,12.7
  pour Bottom (no thermals): 29.72,21.08 34.04,21.08 34.04,15.88 32.13,15.88 31.37,16.64 31.37,19.3 30.48,20.19 29.72,20.19
  pour Top (no thermals): 29.97,21.08 34.04,21.08 34.04,15.88 31.11,15.88 30.86,16.13 30.86,18.29 29.97,19.18
  pour Route2: 12.19,27.94 13.21,28.96 15.49,28.96 18.54,32 30.78,32 33.27,28.97 33.27,20.57 31.74,19.04 30.11,19.04 30.11,20.46 31.5,21.84 31.5,27.69 28.19,30.99 18.54,30.99 13.97,26.42 12.7,26.42 12.19,26.92
+5V_IMON  (2 unrouted)
  Top 0.152: R11.2 29.38,4.69 29.81,4.26 30.69,4.26 30.95,4.51 30.95,5.75 32.61,7.42 32.61,9.09 34.49,10.96 34.49,27.94 34.13,28.29 31.85,28.29
+5V_IMON_SENSE_N  (via drill 0.25)
  Top 0.152: v28.4,15.95 27.96,15.95 27.96,14.16 30.79,11.34 30.79,7.95 v30.96,7.95
  Bottom 0.152: U5.2 28.54,2.37 28.37,2.54 28.37,3.01 30.42,5.06 30.42,6.6 30.79,6.96 30.79,7.95 v30.96,7.95 | v28.4,15.95 28.4,16.13 SH4.1
+5V_IMON_SENSE_P  (via drill 0.25)
  Top 0.152: v27.74,15.95 27.66,15.95 27.66,14.03 30.48,11.21 30.48,7.95 v30.3,7.95
  Bottom 0.152: v30.3,7.95 30.48,7.95 30.48,7.11 30.12,6.75 30.12,5.19 28.07,3.14 28.07,2.49 U5.3 | SH3.1 27.58,16.1 v27.74,15.95
+5V_INT_VMON  (3 unrouted)
+5V_REG  (via drill 0.25)  (8 unrouted)
  Top 0.152: v15.16,13.59 12.93,13.59 v12.8,13.72 | v8.33,13.06 8.33,12.5 8.69,12.14 U3.4
  Bottom 0.152: 17.4,12.62 C17.1 17.05,13.06 15.7,13.06 v15.16,13.59 | v8.33,13.06 8.47,13.19 12.28,13.19 v12.8,13.72 | 27.22,9.66 27.61,9.27 27.61,9.39 | SH1.2 27.22,9.08 R7.1
  other vias: 25.53,11.56 25.53,10.92
  pour Bottom (no thermals): 16.51,13.34 24.26,13.34 25.91,11.69 25.91,10.67 26.67,9.91 27.18,9.91 27.19,8.64 26.67,8.64 24.13,11.18 18.8,11.18 18.16,11.81 16.51,11.81
  pour Top (no thermals): 29.84,10.79 27.18,10.79 26.04,11.94 25.27,11.94 25.27,10.16 27.69,7.75 29.84,7.75
+5V_VMON  (3 unrouted)
+12V_FB  (2 unrouted)
+12V_IMON  (2 unrouted)
  Top 0.152: R10.2 27.33,4.69 26.98,4.34 26.98,3.3 28.42,1.85 29.97,1.85 31.25,3.14 31.25,5.6 32.92,7.26 32.92,8.92 35.03,11.03 35.03,28.57 33.7,29.89 31.49,29.89
+12V_INT_VMON  (3 unrouted)
+12V_REG  (via drill 0.25)  (8 unrouted)
  Top 0.152: U2.4 9.57,21.79 v9.56,21.8 | v19.6,17.04 19.07,16.51 8.62,16.51 8.13,17.01 8.13,17.93 7.92,18.14 7.92,18.5 8.13,18.7 8.13,22.2 v8.18,22.25
  Bottom 0.152: v19.6,17.04 20.3,17.04 C5.1 | v8.18,22.25 8.62,21.8 v9.56,21.8 | SH3.2 26.85,17.04 R6.1
  other vias: 25.65,17.53 25.65,16.89
  pour Bottom (no thermals): 19.18,18.29 24.89,18.29 24.89,17.78 26.92,17.78 26.92,15.88 25.4,15.88 25.4,13.72 23.37,13.72 23.37,16.64 19.18,16.64
  pour Top (no thermals): 29.59,19.94 27.05,19.94 24.89,17.78 24.89,16 25.65,16 26.42,16.76 29.59,16.76
+12V_VMON  (3 unrouted)
+V_BAT  (via drill 0.25, 0.76)  (45 unrouted)
  Top 0.152: R22.2 15.62,3.43 v16.38,4.19 | v12.57,8.76 13.34,8 C21.1
  Top 0.305: U2.11 15.41,21.3 15.39,21.3 15.21,21.48 15.21,24.14 C12.1
  Top 1.016: C23.1 7.74,7.81 v6.94,7.01
  Bottom 0.152: v16.38,4.19 13.3,4.19 12.39,5.1 12.39,8.58 v12.57,8.76 | C24.1 18.73,16.02 19.1,16.38
  Bottom 0.254: IC1.6 30.67,32.65 33.11,30.22 J4.1 31.65,27.29 R34.2
  Bottom 0.305: C24.1 18.69,16.1 17.83,16.97 v17.83,18.03 v17.83,19.23
  other vias: 30.86,22.48 30.86,23.24 30.86,21.72 30.86,25.53 30.86,24.77 30.86,24 17.96,20.32 17.86,19.79 17.86,18.59 18.8,19.05 17.27,11.23 17.91,11.07
  pour Top (no thermals): 8.76,18.03 17.14,18.03 17.14,19.61 15.06,19.61 15.06,21.23 17.63,21.23 19.48,19.38 19.48,16.89 8.76,16.89
  pour Top (no thermals): 8.76,8.38 17.14,8.38 17.14,9.96 15.57,9.96 15.57,11.58 17.63,11.58 18.21,11 18.21,7.24 8.76,7.24
  pour Top (rank 2, no thermals): 29.08,24.51 29.08,21.21 30.61,21.21 30.86,21.46 34.04,21.46 34.04,27.56 31.62,27.56 31.62,27.05
  pour Bottom (no thermals): 30.35,25.53 30.35,21.46 34.04,21.46 34.04,27.46 31.47,27.46 31.47,26.64
  pour Route15 (no thermals): 16,20.57 24.89,20.57 30.48,26.16 31.5,26.16 32,25.65 32,22.35 29.46,19.81 29.46,9.4 19.81,9.4 17.53,7.11 9.91,7.11 8.81,6.02 6.43,6.02 5.84,6.6 5.84,8.13 11.68,13.97 11.68,16.26 13.46,18.03
+V_BAT_IMON  (2 unrouted)
+V_BAT_IMON_SENSE_N
  Bottom 0.152: U4.5 10.72,34.81 10.72,34.07 11.04,33.76 16.03,33.76 SH6.1
+V_BAT_IMON_SENSE_P1
  Bottom 0.152: U4.4 11.02,34.82 11.02,34.2 11.16,34.06 11.37,34.06 arc90 11.64,34.33 11.64,34.36 arc-90 11.91,34.62 11.93,34.62 arc-90 12.2,34.36 12.2,34.33 arc90 12.47,34.06 12.49,34.06 arc90 12.76,34.33 12.76,34.36 arc-90 13.03,34.62 13.06,34.62 arc-90 13.32,34.36 13.32,34.33 arc90 13.59,34.06 15.42,34.06 SH5.1
+V_BAT_INT  (via drill 0.25)
  Top 0.152: R20.2 11.05,3.43 10.58,3.9 10.58,4.45 10.06,4.97 8.52,4.97 7.26,6.24 6.62,6.24 6.5,6.35 4.83,6.35 4.7,6.48 v1.14,6.48
  Bottom 0.152: v13.59,37.97 14.96,37.97 F1.2 | SH5.2 15.33,35.42 15.23,35.42 15.26,35.38 R5.1 15.93,34.99 SH5.2
  Bottom 1.27: F1.2 15.23,37.17 15.23,35.42
  pour Route15: 15.49,39.37 0,39.37 0,5.84 1.27,5.84 1.78,6.35 1.78,29.46 9.65,37.34 15.49,37.34
+V_BAT_INT_VMON  (3 unrouted)
+V_BAT_VMON  (3 unrouted)
AGND  (via drill 0.25)  (17 unrouted)
  Bottom 0.152: U5.4 27.18,2.25 27.18,1.78 v26.92,1.52
  other vias: 30.12,2.67
  pour Top: 6.1,0 6.1,5.33 7.37,6.6 31.5,6.6 32.77,5.33 32.77,0
  pour Route2: 6.1,0.51 6.1,5.84 8.23,7.98 9.75,7.98 10.92,9.14 12.95,7.11 16.26,7.11 18.29,5.08 19.56,5.08 21.59,7.11 31.5,7.11 32.77,5.84 32.77,0.51
  pour Bottom: 32.77,0.51 32.77,5.84 31.5,7.11 7.37,7.11 6.1,5.84 6.1,0.51
CAN0_P  (via drill 0.25)
  Top 0.152: R26.2 9.27,26.19 6.72,26.19 J1.4 v5.15,26.48
  Bottom 0.152: U7.7 9.5,26.67 9.02,26.19 6.52,26.19 J2.4 v5.15,26.48
CAN1_N  (via drill 0.25)  (1 unrouted)
  Top 0.152: J1.5 v3.55,25.68
CAN1_P  (via drill 0.25)  (1 unrouted)
  Top 0.152: J1.3 v3.55,26.48
CAN_N  (via drill 0.25)  (1 unrouted)
  Top 0.152: R26.1 9.27,25.88 6.72,25.88 J1.6 v5.15,25.68
  Bottom 0.152: 6.52,25.88 9.02,25.88 9.5,25.4 U7.6
CAN_STBY  (via drill 0.25)  (1 unrouted)
  Top 0.152: v9.14,31.75 8.38,30.99 v8.38,28.45
  Bottom 0.152: v9.14,31.75 11.2,31.75 11.3,31.85 16.89,31.85 16.99,31.75 17.96,31.75 | U7.8 8.89,27.94 v8.38,28.45
CANRX  (1 unrouted)
  Bottom 0.152: 17.2,29.58 15.01,29.58 14.02,28.59 14.02,27.57 14.26,27.32 15.79,27.32 16.12,26.99 16.12,24.73 15.53,24.13 U7.4
CANTX  (1 unrouted)
  Bottom 0.152: 15.88,28.8 U7.1
DETECT_A  (1 unrouted)
  Top 0.152: 13.13,29.18 10.64,29.18 9.91,28.45 9.91,25.15 8.85,24.09 J1.10
DETECT_B  (via drill 0.25)  (1 unrouted)
  Top 0.152: v8.45,23.65 8.96,23.65 10.21,24.9 10.21,28.19 10.89,28.88 13.38,28.88
  Bottom 0.152: v8.45,23.65 8.02,24.09 J2.10
DGND  (via drill 0.25)  (20 unrouted)
  Top 0.152: C29.2 11.43,27.29 v11.43,27.94 | C30.2 13.59,25.27 v13.72,25.4
  Top 0.254: R30.2 15.3,27.61 15.31,27.61 15.62,27.31 v15.62,26.11 | v20.07,27.94 20.07,27.68 20.61,27.14 C2.2
  Top 0.305: R31.1 5.72,5.45 v5.33,5.84 | 18.1,31.24 J6.9 15.88,30.48 14.86,30.48 J6.5 J6.3
  Bottom 0.152: v15.62,26.11 15.62,26.49 15.44,26.67 U7.2 | R8.2 v2.92,8 | U4.2 U4.1 9.41,36.89 v9.32,36.98 | C31.2 13.45,35.55 v13.46,35.56
  pour Route2 (rank 3): 0,39.37 39.37,39.37 39.37,0 0,0
ETH_RX+  (via drill 0.25)
  Top 0.152: v5.15,13.69 J1.36
  Bottom 0.152: J2.36 v5.15,13.69
ETH_RX-  (via drill 0.25)
  Top 0.152: v5.15,12.88 J1.38
  Bottom 0.152: J2.38 v5.15,12.88
ETH_TX+  (via drill 0.25)
  Top 0.152: v5.15,15.29 J1.32
  Bottom 0.152: J2.32 v5.15,15.29
ETH_TX-  (via drill 0.25)
  Top 0.152: v5.15,14.48 J1.34
  Bottom 0.152: J2.34 v5.15,14.48
GND1  (via drill 0.25)  (2 unrouted)
  Top 0.305: SH7.1 10.45,19.18 U2.8 9.72,19.19 9.48,19.43 9.42,19.43 v9.34,19.51
  Bottom 0.152: v12.42,19.33 12.3,19.33 R2.1
  Bottom 0.305: C13.2 9.96,22.31 8.97,22.31 8.63,22.66 v8.6,22.66 | R2.1 11.9,18.88 12.09,18.69 | 12.09,18.69 C15.2 | 12.09,18.69 11.43,18.03 8.89,18.03 8.61,18.32 v8.35,18.32 8.64,18.6 C14.2 8.9,19.8 9.19,19.51 v9.34,19.51
  pour Route2: 8.13,23.11 8.13,17.78 11.94,17.78 13.21,19.05 13.21,19.3 9.4,23.11
GND2  (via drill 0.25)  (1 unrouted)
  Top 0.305: v8.43,10.46 8.63,10.27 8.63,9.19 8.93,8.89 9.35,8.89 9.99,9.54 U3.8 SH8.1
  Bottom 0.305: C25.2 10.27,11.68 9.27,11.68 8.66,11.07 C26.2 8.43,11.01 v8.43,10.46 | v12.2,13.72 11.85,13.72 R4.1 11.49,14.07 C27.2
  pour Route2: 7.37,10.16 7.37,10.92 11.68,15.24 12.95,13.97 12.95,13.46 10.92,11.43 10.92,10.16 9.4,8.64 8.89,8.64
I2C_SCL  (via drill 0.25)
  Top 0.152: v5.15,19.29 J1.22
  Bottom 0.152: J2.22 v5.15,19.29
I2C_SDA  (via drill 0.25)
  Top 0.152: v5.15,20.09 J1.20
  Bottom 0.152: J2.20 v5.15,20.09
N$1  (via drill 0.25)
  Top 0.152: U2.3 9.48,22.44 8.74,21.69 8.74,19.46 v9.27,18.92
  Bottom 0.152: v9.27,18.92 R2.2
N$2  (via drill 0.25)
  Top 0.152: U2.6 9.69,20.49 v9.65,20.45
  Bottom 0.152: v9.65,20.45 9.76,20.56 C13.1 11.88,20.56 R1.2
N$3  (via drill 0.25)
  Top 0.152: v15.21,19.28 15.3,19.19 U2.9
  Bottom 0.152: C3.1 15.24,19.25 v15.21,19.28
N$4  (via drill 0.25)
  Top 0.152: v17.2,22.09 16.85,22.44 U2.14
  Bottom 0.152: v17.2,22.09 14.52,19.41 14.52,17.02 C3.2
  pour Top (rank 2, no thermals): 15.49,22.61 19.05,22.61 21.59,20.07 22.86,20.07 22.86,16.76 20.32,16.76 20.32,19.18 17.91,21.59 15.49,21.59
N$5
  pour Top (rank 2, no thermals): 15.49,12.95 18.41,12.95 20.45,10.92 22.86,10.92 22.86,7.62 20.32,7.62 20.32,8.13 19.3,9.14 18.67,9.14 18.67,10.41 17.14,11.94 15.49,11.94
N$6  (via drill 0.25)
  Top 0.152: U3.9 16.22,9.53 15.38,9.53 v15.19,9.71 | C45.1 19.18,8.18 v18.78,8.58
  Bottom 0.152: v15.19,9.71 16.03,8.87 18.46,8.87 18.76,8.58 v18.78,8.58
N$7  (via drill 0.25)
  Top 0.152: U3.6 9.57,10.84 v9.53,10.79
  Bottom 0.152: v9.53,10.79 9.78,10.79 10.18,10.4 C25.1 11.76,10.4 R3.2
N$8
  Bottom 0.152: C14.1 9.83,21.1 10.01,21.28 10.96,21.28 11.94,22.26 R1.1
N$9
  Bottom 0.152: R3.1 11.69,12.28 8.69,12.28 C26.1
N$10  (via drill 0.25)
  Top 0.152: v8.76,13.84 8.76,13.34 9.31,12.79 U3.3
  Bottom 0.152: R4.2 8.87,13.95 v8.76,13.84
N$11  (1 unrouted)
  Bottom 0.152: R6.2 29.11,16.69 28.88,16.69 SH4.2 | IC2.4 28.7,18.82 Q2.2
  Bottom 0.762: Q2.2 29.01,17.09 28.92,17
N$12
  Bottom 0.152: R7.2 28.92,9.05 SH2.2 | IC3.4 29.52,10.94 Q3.2
  Bottom 0.762: R7.2 29.52,9.87 Q3.2
  pour Bottom (no thermals): 28.83,9.27 29.34,8.76 28.83,8.76
N$13  (via drill 0.35)
  Top 0.254: Q1.1 29.72,31.41 v29.72,34.04
  Bottom 0.254: v29.72,34.04 IC1.5
N$14
  Bottom 0.254: C33.1 29.61,28.95 R34.1 30.99,29.8 30.67,30.12 IC1.1
N$16
  Bottom 1.27: F1.1 23.9,37.44 U$13.P$1
N$17
  Bottom 0.152: R9.1 9.03,33.9 9.02,33.91 9.02,34.12 U4.6
N$18  (via drill 0.25)
  Top 0.152: R10.1 28.15,3.1 v29.44,3.1
  Bottom 0.152: v29.44,3.1 29.44,2.56 U5.1
N$19  (via drill 0.35, 0.51)  (5 unrouted)
  Top 0.254: Q1.2 25.41,31.77 26.65,33.02 v26.67,33.02
  Bottom 0.152: SH6.2 17.63,34.98 R5.2
  Bottom 0.254: v26.67,33.02 28.75,33.02 IC1.4
  other vias: 19.43,35.94 20.45,35.94 19.43,34.92 20.45,34.92
  pour Top (no thermals): 18.92,34.42 23.5,29.84 26.04,29.84 26.04,32.54 24.61,32.54 20.7,36.45 18.92,36.45
  pour Bottom (no thermals): 17.14,36.45 20.95,36.45 20.95,34.42 17.14,34.42
N$20
  Bottom 0.152: IC2.5 26.67,19.08 27.24,19.64 29.8,19.64 Q2.1
N$21  (via drill 0.25)
  Top 0.152: R11.1 28.18,4.31 v28.18,5.41
  Bottom 0.152: v28.18,5.41 28.56,5.79 28.56,6.7 U5.7
N$22
  Bottom 0.152: IC2.1 25.95,21.55 25.95,22.11 26.56,22.72 C34.1 R27.1
N$25
  Bottom 0.152: IC3.5 27.18,11.2 28.12,12.15 30.69,12.15 Q3.1
N$26
  Bottom 0.152: IC3.1 26.35,13.56 C35.1 26.35,14.81 26.93,15.38 28.26,15.38 28.66,14.99 R28.1
N$29  (2 unrouted)
N$30  (1 unrouted)
P_GOOD  (via drill 0.25)  (2 unrouted)
  Top 0.152: J3.39 33.4,11.59 v33.4,11.46
  Bottom 0.152: J4.39 33.4,12.09 v33.4,11.46
PGND  (via drill 0.25, 0.36, 0.64, 0.76)  (42 unrouted)
  Top 0.152: U3.17 v12.7,11.81 | U2.15 16.26,23.11 v16.87,23.11 | U2.17 11.91,20.04 | C9.2 13.72,15.56
  Top 0.254: C1.2 19.72,25.91 v20.07,25.91 20.57,25.91 21.08,25.4 | R30.1 14.86,25.49 C12.2 | U6.5 20.34,24.99 20.59,24.99 21,25.4 21.08,25.4 | U6.2 21.59,24.89 21.08,25.4
  Top 0.305: C12.2 14.77,24.93 13.34,23.5 v13.34,22.1 U2.17 | SH8.2 11.94,9.78 11.94,10.41 U3.17 | 11.91,20.04 11.91,19.41 SH7.2 | D1.2 19.23,23.5 v19.51,23.77 | 13.46,5.91 C21.2 C22.2 | U3.15 16.25,13.45 17.08,13.45 17.49,13.86 v17.53,13.86 | C10.2 13.72,15.56
  Top 0.406: v36.07,27.29 J3.2 | v36.07,26.48 J3.4 | v36.07,25.68 J3.6 | v36.07,24.89 J3.8 | v36.07,14.48 J3.34 | v36.07,13.69 J3.36 | v36.07,12.88 J3.38 | v36.07,12.09 J3.40 | v36.07,17.68 J3.26 | v36.07,16.89 J3.28 | v36.07,16.09 J3.30 | v36.07,15.29 J3.32 | v36.07,20.89 J3.18 | v36.07,20.09 J3.20 | v36.07,19.29 J3.22 | v36.07,18.48 J3.24 | v36.07,24.09 J3.10 | v36.07,23.29 J3.12 | v36.07,22.48 J3.14 | v36.07,21.68 J3.16
  Top 0.508: C7.2 18.73,14.35 D2.2
  Top 1.016: C11.2 13.72,15.56 C8.2 C7.2 18.8,14.29 20,14.29 v20.32,14.61 | C23.2 13.46,5.91 C20.2 C19.2 18.36,5.91 18.37,5.92 19.05,5.92 v19.05,5.97
  Bottom 0.152: C18.2 C16.2 | IC3.3 28.13,14.23 C35.2 27.18,14.23 IC3.2 | C34.2 25.22,22.82 25.22,21.15 24.64,20.57 24.89,20.32 25.94,20.32 26.67,21.05 IC2.2 IC2.3
  Bottom 0.254: IC1.3 29.01,30.5 | 29.01,30.5 IC1.2 | C33.2 28.31,29.8 29.01,30.5
  Bottom 0.305: C16.2 23.57,9.65 | C24.2 18.69,17.88 v18.87,18.06
  Bottom 0.406: J4.2 v36.07,27.29 | J4.4 v36.07,26.48 | J4.6 v36.07,25.68 | J4.8 v36.07,24.89 | J4.34 v36.07,14.48 | J4.36 v36.07,13.69 | J4.38 v36.07,12.88 | J4.40 v36.07,12.09 | J4.26 v36.07,17.68 | J4.28 v36.07,16.89 | J4.30 v36.07,16.09 | J4.32 v36.07,15.29 | J4.18 v36.07,20.89 | J4.20 v36.07,20.09 | J4.22 v36.07,19.29 | J4.24 v36.07,18.48 | J4.10 v36.07,24.09 | J4.12 v36.07,23.29 | J4.14 v36.07,22.48 | J4.16 v36.07,21.68
  Bottom 0.508: C4.2 v22.15,20.58 | v22.15,20.58 21.03,20.58 C5.2 | v22.15,20.57 v22.15,20.58
  Bottom 1.016: C6.2 20.83,15.11 v20.32,14.61 | C17.2 23.32,9.9 23.57,9.65 | v25.14,9.02 25.17,9.06 25.08,9.15 24.86,9.15 24.36,9.65 C16.2
  other vias: 13.34,20.83 13.97,21.46 12.7,21.46 13.34,11.18 13.34,12.45 13.97,11.81 22.78,20.57
  pour Route2 (rank 2, no thermals): 11.68,22.86 11.68,0 39.37,0 39.37,39.37 28.45,39.37 28.45,32.26 32.77,27.94 32.77,22.92 32.26,22.35 25.91,22.35 25.91,21.08 23.88,21.08 20.32,24.64 20.32,26.67 18.29,26.67 15.75,24.13 12.95,24.13
  pour Route15 (rank 5): 13.72,39.37 39.37,39.37 39.37,7.87 39.37,0 23.11,0 13.72,0
PGOOD_+3.5V  (1 unrouted)
PGOOD_+5V  (1 unrouted)
RESET  (1 unrouted)
  Bottom 0.152: 19.46,32.1 19.05,32.51 J6.10
RFU_9  (via drill 0.25)
  Top 0.152: J1.9 v3.55,24.09
  Bottom 0.152: J2.9 v3.55,24.09
RFU_11  (via drill 0.25)
  Top 0.152: J1.11 v3.55,23.29
  Bottom 0.152: J2.11 v3.55,23.29
RFU_13  (via drill 0.25)
  Top 0.152: J1.13 v3.55,22.48
  Bottom 0.152: J2.13 v3.55,22.48
RFU_15  (via drill 0.25)
  Top 0.152: J1.15 v3.55,21.68
  Bottom 0.152: J2.15 v3.55,21.68
RFU_17  (via drill 0.25)
  Top 0.152: J1.17 v3.55,20.89
  Bottom 0.152: J2.17 v3.55,20.89
RFU_19  (via drill 0.25)
  Top 0.152: J1.19 v3.55,20.09
  Bottom 0.152: J2.19 v3.55,20.09
RFU_21  (via drill 0.25)
  Top 0.152: J1.21 v3.55,19.29
  Bottom 0.152: J2.21 v3.55,19.29
RFU_23  (via drill 0.25)
  Top 0.152: J1.23 v3.55,18.48
  Bottom 0.152: J2.23 v3.55,18.48
RFU_25  (via drill 0.25)
  Top 0.152: J1.25 v3.55,17.68
  Bottom 0.152: J2.25 v3.55,17.68
RFU_27  (via drill 0.25)
  Top 0.152: J1.27 v3.55,16.89
  Bottom 0.152: J2.27 v3.55,16.89
RFU_29  (via drill 0.25)
  Top 0.152: J1.29 v3.55,16.09
  Bottom 0.152: J2.29 v3.55,16.09
RFU_31  (via drill 0.25)
  Top 0.152: J1.31 v3.55,15.29
  Bottom 0.152: J2.31 v3.55,15.29
RFU_33  (via drill 0.25)
  Top 0.152: J1.33 v3.55,14.48
  Bottom 0.152: J2.33 v3.55,14.48
RFU_35  (via drill 0.25)
  Top 0.152: J1.35 v3.55,13.69
  Bottom 0.152: J2.35 v3.55,13.69
RFU_37  (via drill 0.25)
  Top 0.152: J1.37 v3.55,12.88
  Bottom 0.152: J2.37 v3.55,12.88
RS485_D+  (via drill 0.25)
  Top 0.152: v5.15,17.68 J1.26
  Bottom 0.152: J2.26 v5.15,17.68
RS485_D-  (via drill 0.25)
  Top 0.152: v5.15,16.89 J1.28
  Bottom 0.152: J2.28 v5.15,16.89
SHIELD  (via drill 0.25)  (9 unrouted)
  Top 0.152: J1.1 v3.55,27.29 | v5.15,12.09 J1.40 | J1.39 v3.55,12.09 | v5.15,16.09 J1.30 | v5.15,18.48 J1.24 | v5.15,20.89 J1.18 | v5.15,24.89 J1.8 | v5.15,27.29 J1.2
  Bottom 0.152: J2.1 v3.55,27.29 | J2.40 6.1,12.09 | 6.1,12.09 v5.15,12.09 | J2.39 v3.55,12.09 | J2.30 v5.15,16.09 | J2.24 v5.15,18.48 | J2.18 v5.15,20.89 | J2.8 v5.15,24.89 | J2.2 v5.15,27.29 | R8.1 4.95,8.64 6.1,9.79 6.1,12.09
  pour Bottom (rank 4): 0,30.86 7.24,30.86 7.24,9.02 6.99,8.76 6.99,7.75 5.46,7.75 4.19,9.02 3.56,9.02 0,9.02
  pour Top (rank 4): 39.37,39.37 0,39.37 0,0 39.37,0
SPI_MISO  (via drill 0.25)
  Top 0.152: v5.15,23.29 J1.12
  Bottom 0.152: J2.12 v5.15,23.29
SPI_MOSI  (via drill 0.25)
  Top 0.152: v5.15,22.48 J1.14
  Bottom 0.152: J2.14 v5.15,22.48
SPI_SCK  (via drill 0.25)
  Top 0.152: v5.15,21.68 J1.16
  Bottom 0.152: J2.16 v5.15,21.68
SWCLK  (2 unrouted)
  Bottom 0.152: J6.4 13.44,33.12 22.5,33.12 23.46,32.16
SWDIO  (1 unrouted)
  Bottom 0.152: J6.2 12.47,33.43 23.01,33.43 24.25,32.19 24.25,31.06
VBIAS_U2  (via drill 0.25)
  Top 0.152: U2.2 11.38,23.09 11.38,21.14 11.38,19.84 11.14,19.84 | 11.14,19.84 U2.7 11.09,19.84 v11.14,19.79 11.14,19.84
  Bottom 0.152: C15.1 13.34,19.11 12.57,19.88 11.23,19.88 v11.14,19.79
VBIAS_U3  (via drill 0.25)  (1 unrouted)
  Top 0.152: U3.7 11.2,10.19 11.38,10.36 11.38,13.26 11.2,13.44 U3.2 9.83,13.44 8.26,15.01 v8.26,15.27 | U3.5 10.23,11.28 9.32,11.28 9.04,10.99 9.04,9.49 v9.14,9.4
  Bottom 0.152: C27.1 8.61,15.62 v8.26,15.27